# EAGLE board test (EAGLE 5.11)
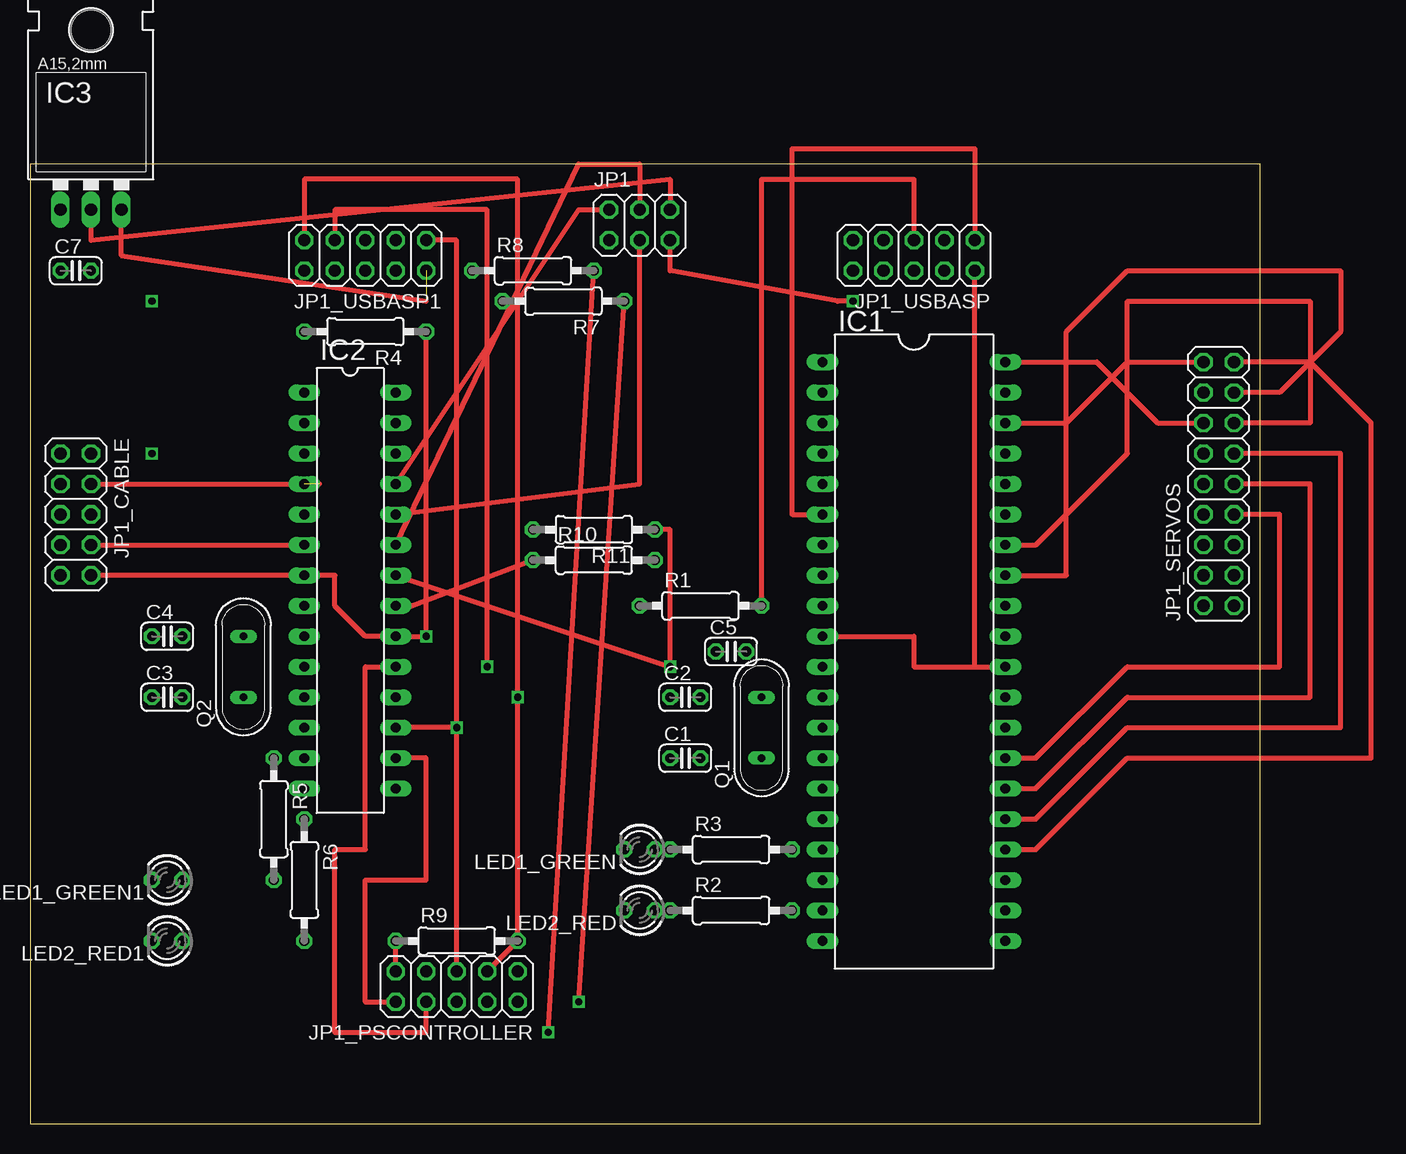
[diagram p0: board, top side]
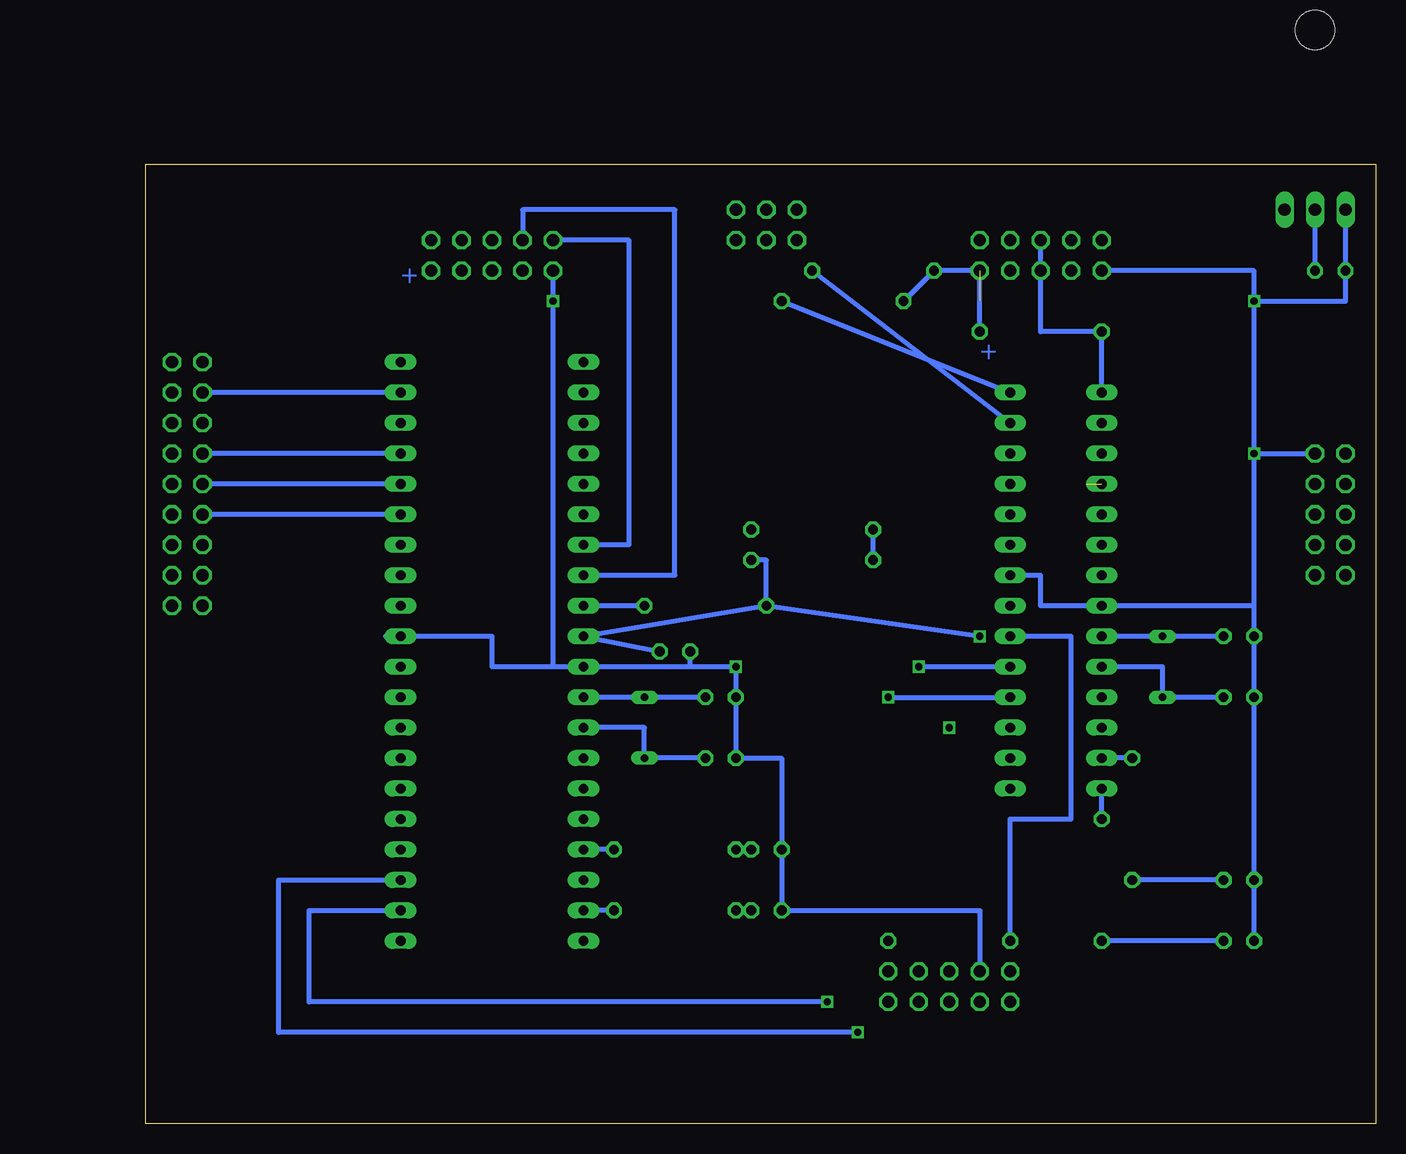
[diagram p1: board, bottom side, seen from below]

Size 102.54 x 80 mm. Coordinates in mm from the lower left corner, seen from the top.
Outline: 0,0 102.54,0 102.54,80 0,80 0,0
Copper layers (1*16): Top 0.035mm / dielectric 1.5mm / Bottom 0.035mm
Design rules "default": minimum track width 10mil, minimum drill 24mil, track to track 8mil, track to pad 8mil, pad to pad 8mil, via to via 8mil, smd to smd 8mil, copper to edge 40mil, drill to drill 8mil, minimum pad ring 10mil, minimum via ring 8mil, stop-mask expansion 4mil, vias tented up to drill 0mil, thermal gap 10mil

## Footprints (pad centres in the part's own frame; a part is rotated, then mirrored left to right if it is on the bottom)
C025-024X044 = drill 0.813 octagon: 1 -1.27,0; 2 1.27,0
DIL40 = drill 0.813 long: 1 -24.13,-7.62; 2 -21.59,-7.62; 3 -19.05,-7.62; 4 -16.51,-7.62; 5 -13.97,-7.62; 6 -11.43,-7.62; 7 -8.89,-7.62; 8 -6.35,-7.62; 9 -3.81,-7.62; 10 -1.27,-7.62; 11 1.27,-7.62; 12 3.81,-7.62; 13 6.35,-7.62; 14 8.89,-7.62; 15 11.43,-7.62; 16 13.97,-7.62; 17 16.51,-7.62; 18 19.05,-7.62; 19 21.59,-7.62; 20 24.13,-7.62; 21 24.13,7.62; 22 21.59,7.62; 23 19.05,7.62; 24 16.51,7.62; 25 13.97,7.62; 26 11.43,7.62; 27 8.89,7.62; 28 6.35,7.62; 29 3.81,7.62; 30 1.27,7.62; 31 -1.27,7.62; 32 -3.81,7.62; 33 -6.35,7.62; 34 -8.89,7.62; 35 -11.43,7.62; 36 -13.97,7.62; 37 -16.51,7.62; 38 -19.05,7.62; 39 -21.59,7.62; 40 -24.13,7.62
DIL28-3 = drill 0.813 long: 1 -16.51,-3.81; 2 -13.97,-3.81; 3 -11.43,-3.81; 4 -8.89,-3.81; 5 -6.35,-3.81; 6 -3.81,-3.81; 7 -1.27,-3.81; 8 1.27,-3.81; 9 3.81,-3.81; 10 6.35,-3.81; 11 8.89,-3.81; 12 11.43,-3.81; 13 13.97,-3.81; 14 16.51,-3.81; 15 16.51,3.81; 16 13.97,3.81; 17 11.43,3.81; 18 8.89,3.81; 19 6.35,3.81; 20 3.81,3.81; 21 1.27,3.81; 22 -1.27,3.81; 23 -3.81,3.81; 24 -6.35,3.81; 25 -8.89,3.81; 26 -11.43,3.81; 27 -13.97,3.81; 28 -16.51,3.81
TO220L1 = drill 1.016 long: 1 -2.54,-3.81; 2 0,-3.81; 3 2.54,-3.81 | hole 3.302: 0,11.176
2X03 = drill 1.016 octagon: 1 -2.54,-1.27; 2 -2.54,1.27; 3 0,-1.27; 4 0,1.27; 5 2.54,-1.27; 6 2.54,1.27
2X05 = drill 1.016 octagon: 1 -5.08,-1.27; 2 -5.08,1.27; 3 -2.54,-1.27; 4 -2.54,1.27; 5 0,-1.27; 6 0,1.27; 7 2.54,-1.27; 8 2.54,1.27; 9 5.08,-1.27; 10 5.08,1.27
2X09 = drill 1.016 octagon: 1 -10.16,-1.27; 2 -10.16,1.27; 3 -7.62,-1.27; 4 -7.62,1.27; 5 -5.08,-1.27; 6 -5.08,1.27; 7 -2.54,-1.27; 8 -2.54,1.27; 9 0,-1.27; 10 0,1.27; 11 2.54,-1.27; 12 2.54,1.27; 13 5.08,-1.27; 14 5.08,1.27; 15 7.62,-1.27; 16 7.62,1.27; 17 10.16,-1.27; 18 10.16,1.27
LED3MM = drill 0.813 octagon: A -1.27,0; K 1.27,0
QS = drill 0.61 long: 1 -2.54,0; 2 2.54,0
0207/10 = drill 0.813 octagon: 1 -5.08,0; 2 5.08,0

## Placement (x,y rotation side)
C1  [C025-024X044]  54.61,30.48 0 top
C2  [C025-024X044]  54.61,35.56 0 top
C3  [C025-024X044]  11.43,35.56 0 top
C4  [C025-024X044]  11.43,40.64 0 top
C5  [C025-024X044]  58.42,39.37 0 top
C7  0.1u  [C025-024X044]  3.81,71.12 0 top
IC1  MEGA32-P  [DIL40]  73.66,39.37 270 top
IC2  MEGA8-P  [DIL28-3]  26.67,44.45 270 top
IC3  LD117AV  [TO220L1]  5.08,80.01 0 top
JP1  [2X03]  50.8,74.93 0 top
JP1_CABLE  [2X05]  3.81,50.8 270 top
JP1_PSCONTROLLER  [2X05]  35.56,11.43 180 top
JP1_SERVOS  [2X09]  99.06,53.34 90 top
JP1_USBASP  [2X05]  73.66,72.39 180 top
JP1_USBASP1  [2X05]  27.94,72.39 180 top
LED1_GREEN  [LED3MM]  50.8,22.86 180 top
LED1_GREEN1  [LED3MM]  11.43,20.32 180 top
LED2_RED  [LED3MM]  50.8,17.78 180 top
LED2_RED1  [LED3MM]  11.43,15.24 180 top
Q1  [QS]  60.96,33.02 90 top
Q2  [QS]  17.78,38.1 90 top
R1  10k  [0207/10]  55.88,43.18 0 top
R2  2.2k  [0207/10]  58.42,17.78 0 top
R3  2.2k  [0207/10]  58.42,22.86 0 top
R4  10k  [0207/10]  27.94,66.04 180 top
R5  2.2k  [0207/10]  20.32,25.4 270 top
R6  2.2k  [0207/10]  22.86,20.32 270 top
R7  1k  [0207/10]  44.45,68.58 180 top
R8  1k  [0207/10]  41.91,71.12 0 top
R9  2.2k  [0207/10]  35.56,15.24 0 top
R10  1M  [0207/10]  46.99,46.99 0 top
R11  1M  [0207/10]  46.99,49.53 180 top

## Library data of the parts
C1-C5 C7 R1-R11 = resistor
IC1 = atmel; MPN: ATMEGA32-16PU; OC_FARNELL: 1661729; OC_NEWARK: 51P1794
IC2 = atmel; OC_FARNELL: unknown; OC_NEWARK: unknown
IC3 = v-reg
JP1 JP1_CABLE JP1_PSCONTROLLER JP1_SERVOS JP1_USBASP JP1_USBASP1 = pinhead
LED1_GREEN LED1_GREEN1 LED2_RED LED2_RED1 = led
Q1 Q2 = special

## Nets
GND: C1.1 C2.1 C3.1 C4.1 C5.1 C7.1 IC1.11 IC1.31 IC2.8 IC2.22 IC3.1 JP1.5 JP1_CABLE.2 JP1_PSCONTROLLER.7 JP1_USBASP1.10 JP1_USBASP.10 LED1_GREEN1.K LED1_GREEN.K LED2_RED1.K LED2_RED.K R11.1
N$1: IC1.17 R3.2
N$2: LED1_GREEN.A R3.1
N$3: LED2_RED.A R2.1
N$4: IC1.19 R2.2
N$5: IC1.9 JP1_USBASP.5 R1.2
N$6: C2.2 IC1.12 Q1.2
N$7: C1.2 IC1.13 Q1.1
N$8: IC1.6 JP1_USBASP.1
N$9: IC1.8 JP1_USBASP.7
N$10: IC1.7 JP1_USBASP.9
N$11: IC1.22 IC2.28 R7.1
N$12: IC1.40 JP1_SERVOS.14
N$13: IC1.39 JP1_SERVOS.16
N$14: IC1.38 JP1_SERVOS.18
N$15: IC1.37 JP1_SERVOS.12
N$16: IC1.36 JP1_SERVOS.10
N$17: IC1.35 JP1_SERVOS.8
N$18: IC1.34 JP1_SERVOS.13
N$19: IC1.33 JP1_SERVOS.15
N$20: IC1.24 JP1_SERVOS.17
N$21: IC1.25 JP1_SERVOS.11
N$22: IC1.26 JP1_SERVOS.9
N$23: IC1.27 JP1_SERVOS.7
N$24: IC1.23 IC2.27 R8.2
N$25: IC2.13 R5.1
N$26: C3.2 IC2.10 Q2.1
N$27: C4.2 IC2.9 Q2.2
N$28: LED1_GREEN1.A R5.2
N$29: IC2.18 JP1_PSCONTROLLER.3 JP1_USBASP1.9 R9.2
N$30: IC2.19 JP1_PSCONTROLLER.8 JP1_USBASP1.7
N$31: IC2.17 JP1_PSCONTROLLER.5 JP1_USBASP1.1
N$32: IC2.1 JP1_USBASP1.5 R4.2
N$33: LED2_RED1.A R6.2
N$34: IC2.14 R6.1
N$35: IC2.16 JP1_PSCONTROLLER.10
N$36: IC2.6 JP1_CABLE.8
N$37: IC2.4 JP1_CABLE.4
N$38: IC2.25 JP1.2
N$39: IC2.23 JP1.4
N$40: IC2.24 JP1.3
N$41: IC2.21 R10.1 R11.2
N$44: C7.2 IC3.2 JP1.6
VCC: C5.2 IC1.10 IC1.30 IC2.7 IC2.20 IC3.3 JP1_CABLE.10 JP1_PSCONTROLLER.9 JP1_USBASP1.2 JP1_USBASP.2 R1.1 R4.1 R7.2 R8.1 R9.1 R10.2

## Tracks (layer width: path | path; a pad name or v marks a point on that pad's centre or on a via)
GND  (via drill 0.6)
  Top 0.406: IC2.22 v53.34,38.1 53.34,49.53 R11.1 | JP1.5 53.34,71.12 67.31,68.58 v68.58,68.58
  Bottom 0.406: C2.1 53.34,31.75 | C2.1 C1.1 49.53,30.48 LED1_GREEN.K LED2_RED.K 33.02,17.78 JP1_PSCONTROLLER.7 | 57.15,38.1 v53.34,38.1 C2.1 | 57.15,38.1 IC1.11 68.58,38.1 | 68.58,38.1 73.66,38.1 73.66,40.64 IC1.31 82.55,40.64 | 68.58,38.1 v68.58,68.58 JP1_USBASP.10 | LED2_RED1.K LED1_GREEN1.K C3.1 C4.1 10.16,43.18 | 10.16,43.18 IC2.8 27.94,43.18 27.94,45.72 IC2.22 | 10.16,43.18 v10.16,55.88 | v10.16,55.88 JP1_CABLE.2 | 57.15,38.1 C5.1 | IC3.1 C7.1 2.54,68.58 v10.16,68.58 | v10.16,55.88 v10.16,68.58 | v10.16,68.58 10.16,71.12 JP1_USBASP1.10
N$1
  Bottom 0.406: R3.2 IC1.17
N$2
  Bottom 0.406: LED1_GREEN.A R3.1
N$3
  Bottom 0.406: LED2_RED.A R2.1
N$4
  Bottom 0.406: R2.2 IC1.19
N$5
  Top 0.406: JP1_USBASP.5 73.66,78.74 60.96,78.74 R1.2
  Bottom 0.406: R1.2 IC1.9
N$6
  Bottom 0.406: C2.2 Q1.2 IC1.12
N$7
  Bottom 0.406: IC1.13 60.96,33.02 Q1.1 C1.2
N$8
  Top 0.406: IC1.6 63.5,50.8 63.5,81.28 78.74,81.28 JP1_USBASP.1
N$9
  Bottom 0.406: IC1.8 58.42,45.72 58.42,76.2 71.12,76.2 JP1_USBASP.7
N$10
  Bottom 0.406: JP1_USBASP.9 62.23,73.66 62.23,48.26 IC1.7
N$11  (via drill 0.6)
  Top 0.406: v45.72,10.16 R7.1
  Bottom 0.406: IC1.22 88.9,17.78 88.9,10.16 v45.72,10.16 | R7.1 IC2.28
N$12
  Top 0.406: IC1.40 88.9,63.5 93.98,58.42 JP1_SERVOS.14
N$13
  Bottom 0.406: IC1.39 JP1_SERVOS.16
N$14
  Top 0.406: JP1_SERVOS.18 91.44,63.5 86.36,58.42 IC1.38
N$15
  Bottom 0.406: IC1.37 JP1_SERVOS.12
N$16
  Bottom 0.406: IC1.36 JP1_SERVOS.10
N$17
  Bottom 0.406: IC1.35 JP1_SERVOS.8
N$18
  Top 0.406: JP1_SERVOS.13 106.68,58.42 106.68,68.58 91.44,68.58 91.44,55.88 83.82,48.26 IC1.34
N$19
  Top 0.406: IC1.33 86.36,45.72 86.36,66.04 91.44,71.12 109.22,71.12 109.22,66.04 104.14,60.96 JP1_SERVOS.15
N$20
  Top 0.406: IC1.24 83.82,22.86 91.44,30.48 111.76,30.48 111.76,58.42 106.68,63.5 JP1_SERVOS.17
N$21
  Top 0.406: JP1_SERVOS.11 109.22,55.88 109.22,33.02 91.44,33.02 83.82,25.4 IC1.25
N$22
  Top 0.406: JP1_SERVOS.9 106.68,53.34 106.68,35.56 91.44,35.56 83.82,27.94 IC1.26
N$23
  Top 0.406: JP1_SERVOS.7 104.14,50.8 104.14,38.1 91.44,38.1 83.82,30.48 IC1.27
N$24  (via drill 0.6)
  Top 0.406: v43.18,7.62 R8.2
  Bottom 0.406: IC1.23 91.44,20.32 91.44,7.62 v43.18,7.62 | R8.2 IC2.27
N$25
  Bottom 0.406: R5.1 IC2.13
N$26
  Bottom 0.406: IC2.10 17.78,38.1 Q2.1 C3.2
N$27
  Bottom 0.406: IC2.9 Q2.2 C4.2
N$28
  Bottom 0.406: LED1_GREEN1.A R5.2
N$29  (via drill 0.6)
  Top 0.406: JP1_PSCONTROLLER.3 R9.2 v40.64,35.56 40.64,78.74 22.86,78.74 JP1_USBASP1.9
  Bottom 0.406: v40.64,35.56 IC2.18
N$30  (via drill 0.6)
  Top 0.406: JP1_PSCONTROLLER.8 33.02,7.62 25.4,7.62 25.4,22.86 27.94,22.86 27.94,38.1 IC2.19 | JP1_USBASP1.7 25.4,76.2 38.1,76.2 v38.1,38.1
  Bottom 0.406: IC2.19 v38.1,38.1
N$31  (via drill 0.6)
  Top 0.406: JP1_USBASP1.1 35.56,73.66 v35.56,33.02 | v35.56,33.02 IC2.17 | JP1_PSCONTROLLER.5 v35.56,33.02
N$32
  Bottom 0.406: IC2.1 R4.2 27.94,66.04 JP1_USBASP1.5
N$33
  Bottom 0.406: LED2_RED1.A R6.2
N$34
  Bottom 0.406: R6.1 IC2.14
N$35
  Top 0.406: IC2.16 33.02,30.48 33.02,20.32 27.94,20.32 27.94,10.16 JP1_PSCONTROLLER.10
N$36
  Top 0.406: JP1_CABLE.8 IC2.6
N$37  (1 unrouted)
  Top 0.406: JP1_CABLE.4 24.13,53.34
N$38
  Top 0.406: IC2.25 45.72,76.2 JP1.2
N$39
  Top 0.406: IC2.23 45.72,80.01 50.8,80.01 JP1.4
N$40
  Top 0.406: JP1.3 50.8,53.34 IC2.24
N$41
  Top 0.406: R10.1 31.75,43.18 IC2.21
  Bottom 0.406: R10.1 R11.2
N$44
  Top 0.406: JP1.6 53.34,78.74 5.08,73.66 IC3.2
  Bottom 0.406: C7.2 5.08,74.93 IC3.2
VCC  (via drill 0.6)  (1 unrouted)
  Top 0.406: IC1.10 73.66,40.64 73.66,38.1 78.74,38.1 | 78.74,38.1 IC1.30 | 78.74,38.1 JP1_USBASP.2 | JP1_PSCONTROLLER.9 R9.1 | R4.1 v33.02,40.64 IC2.20 27.94,40.64 25.4,43.18 25.4,45.72 IC2.7 JP1_CABLE.10 | IC3.3 7.62,72.39 33.02,68.58
  Bottom 0.406: R7.2 R8.1 JP1_USBASP1.2 R4.1 | R9.1 30.48,25.4 25.4,25.4 25.4,40.64 IC2.20 | R1.1 IC1.10 C5.2 | v33.02,40.64 R1.1 | R10.2 50.8,46.99 R1.1

## Text on the board
Bottom: + | +